# Altium PCB inversor_rev2.PcbDoc
Units mil, origin at the board's own origin, x right, y up, seen from the top; angles counter-clockwise.
Board outline 3939.96 x 3929 mil, 2 copper layers (Top Layer, Bottom Layer); 87 components, 56 nets, 236 pads, 341 vias.
Unrouted connection lines stored in the file: 7.
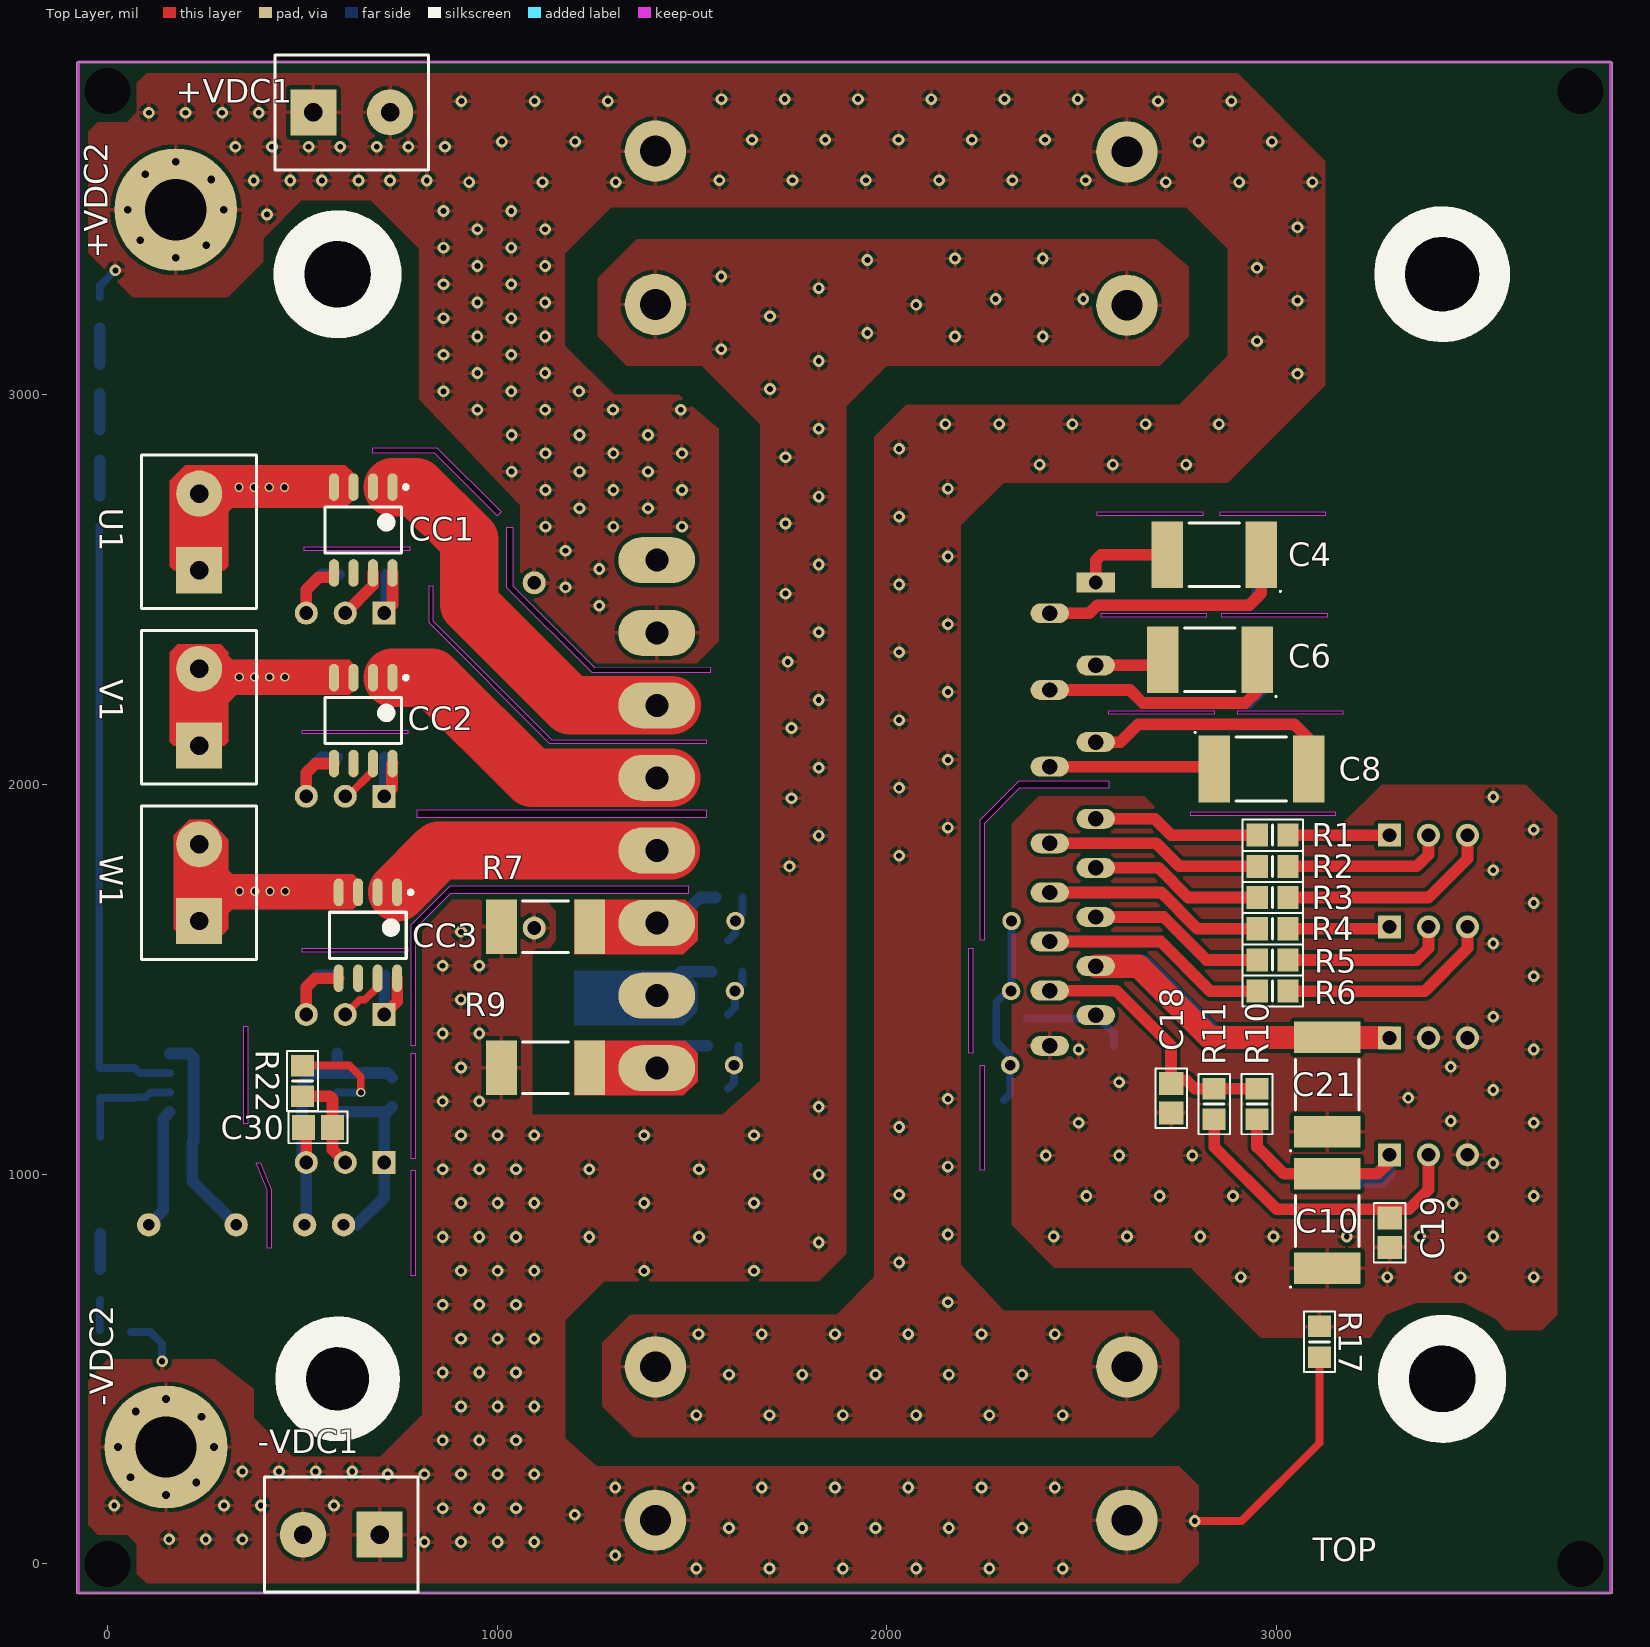
[diagram p0: Top Layer view]
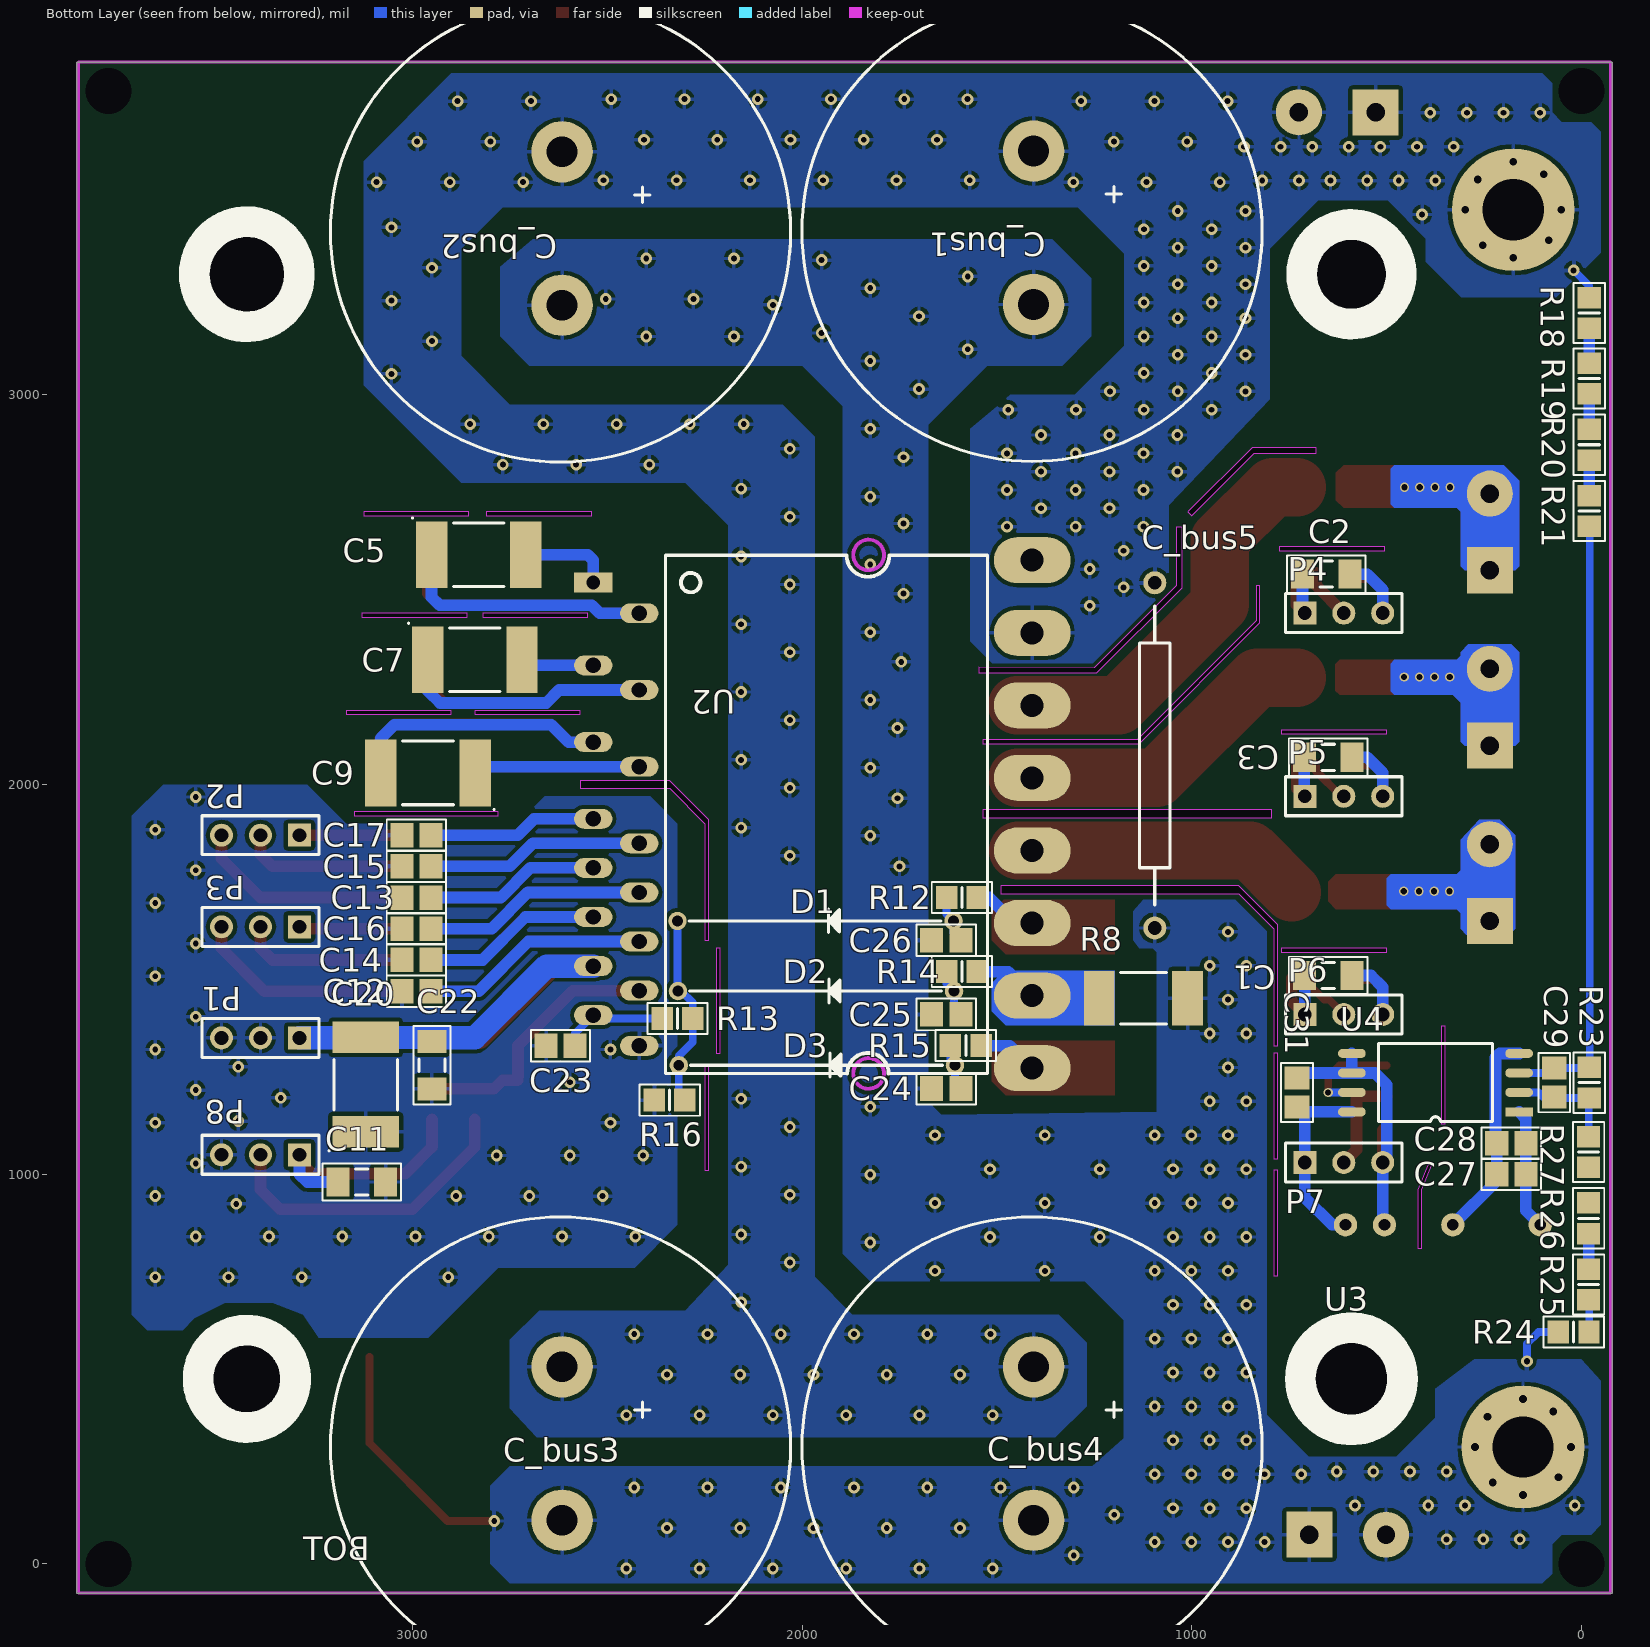
[diagram p1: Bottom Layer view, seen from below]

## Layer stack, top to bottom
Top Solder: solder mask 0.4, Solder Resist, Dk 3.5
Top Layer: signal copper 1.4
Dielectric 1: dielectric 12.6, FR-4, Dk 4.8
Bottom Layer: signal copper 1.4
Bottom Solder: solder mask 0.4, Solder Resist, Dk 3.5

## Board outline
-78.74,-75 3861.22,-75 3861.22,3854 -78.74,3854
cut-out: 790,1330 780,1330 780,1640 880,1740 1490,1740 1490,1720 880,1720 790,1630
cut-out: 795,1935 1536.89,1935 1536.89,1915 795,1915
cut-out: 835,2420 1140.47,2114.53 1536.89,2114.53 1536.89,2105 1135,2105 825,2415 825,2510 835,2510
cut-out: 1024.49,2660.5 1039.5,2660.5 1039.5,2510.5 1250,2300 1546.39,2300.93 1546.39,2286.72 1243.28,2286.72 1024.5,2505.5
cut-out: 680,2865 845,2865 1010,2700 1000,2690 840,2850 680,2850
cut-out: 500,1580 770,1580 770,1570 500,1570
cut-out: 500,2140 770,2140 770,2130 500,2130
cut-out: 505,2610 775,2610 775,2600 505,2600
cut-out: 780,1040 780,1310 790,1310 790,1040
cut-out: 780,740 780,1010 790,1010 790,740
cut-out: 350,1130 350,1380 360,1380 360,1130
cut-out: 410,810 410,960 382,1030 392,1030 420,960 420,810
cut-out: 2550,2440 2820,2440 2820,2430 2550,2430
cut-out: 2540,2700 2810,2700 2810,2690 2540,2690
cut-out: 2855,2700 3125,2700 3125,2690 2855,2690
cut-out: 2570,2190 2840,2190 2840,2180 2570,2180
cut-out: 2900,2190 3170,2190 3170,2180 2900,2180
cut-out: 2860,2440 3130,2440 3130,2430 2860,2430
cut-out: 2780,1930 3150,1930 3150,1920 2780,1920
cut-out: 2240,1010 2240,1280 2250,1280 2250,1010
cut-out: 2210,1310 2210,1580 2220,1580 2220,1310
cut-out: 2250,1600 2240,1600 2240,1910 2340,2010 2570,2010 2570,1990 2340,1990 2250,1900

## Design rules (kind name [scope] priority, off if disabled: settings)
Clearance [All] p1: gap=10 ignorepadtopadclearanceinfootprint=FALSE
Height [All] p1: minheight=0 maxheight=10000 prefheight=500
HoleSize [All] p1: absolutevalues=TRUE maxlimit=1000 minlimit=1 maxpercent=80.000 minpercent=20.000
PlaneClearance [All] p1: clearance=100
PolygonConnect [All] p1: connectstyle=Relief reliefconductorwidth=10 reliefentries=4 polygonreliefangle="90 Angle" airgapwidth=10
RoutingVias [All] p1: holewidth=28 width=50 viastyle="Through Hole" minholewidth=28 minwidth=50 maxholewidth=28 maxwidth=50
SilkToSilkClearance [All] p1: silktosilkclearance=1
SilkToSolderMaskClearance [IsPad] p1: minsilkscreentomaskgap=1 clearancetoexposedcopper=TRUE
SolderMaskExpansion [All] p1: expansion=4
Width [All] p1: maxlimit=150 minlimit=10 preferedwidth=30
25 further rules are at their usual default settings.

## Components (designator, comment, footprint, x,y, rotation, side; value= is the part's Value field where it differs from the comment)
+VDC1 "gen_purpose_conn_1x2" connector1x2_parafuso 626.57,3725 r0 top
+VDC2 "olhal" Olhal 175,3475 r90 top
-VDC1 "gen_purpose_conn_1x2" connector1x2_parafuso 600,75 r180 top
-VDC2 "olhal" Olhal 150,300 r90 top
C1 "Capacitor SMD" CAPC_1206 650,1510 r0 bottom
C2 "Capacitor SMD" CAPC_1206 655,2540 r0 bottom
C3 "Capacitor SMD" CAPC_1206 650,2070 r0 bottom
C4 "Capacitor TANT" CAPC_2917 2840,2590 r180 top
C5 "Capacitor TANT" CAPC_2917 2830,2590 r180 bottom
C6 "Capacitor TANT" CAPC_2917 2828.94,2320 r180 top
C7 "Capacitor TANT" CAPC_2917 2840,2320 r180 bottom
C8 "Capacitor TANT" CAPC_2917 2961.06,2040 r0 top
C9 "Capacitor TANT" CAPC_2917 2960,2030 r0 bottom
C10 "Capacitor TANT" CAPC_2917 3130,880 r90 top
C11 "Capacitor SMD" CAPC_1206 3130,980 r0 bottom
C12 "Capacitor SMD" CAPC_0805 2990,1470 r180 bottom
C13 "Capacitor SMD" CAPC_0805 2990,1710 r180 bottom
C14 "Capacitor SMD" CAPC_0805 2990,1550 r180 bottom
C15 "Capacitor SMD" CAPC_0805 2990,1790 r180 bottom
C16 "Capacitor SMD" CAPC_0805 2990,1630 r180 bottom
C17 "Capacitor SMD" CAPC_0805 2990,1870 r180 bottom
C18 "Capacitor SMD" CAPC_0805 2730,1195 r90 top
C19 "Capacitor SMD" CAPC_0805 3290,850 r90 top
C20 "Capacitor TANT" CAPC_2917 3120,1230 r90 bottom
C21 "Capacitor TANT" CAPC_2917 3130,1230 r90 top
C22 "Capacitor SMD" CAPC_1206 2950,1280 r90 bottom
C23 "Capacitor SMD" CAPC_0805 2620,1330 r180 bottom
C24 "Capacitor SMD" CAPC_0805 1630,1220 r180 bottom
C25 "Capacitor SMD" CAPC_0805 1630,1410 r180 bottom
C26 "Capacitor SMD" CAPC_0805 1630,1600 r180 bottom
C27 "Capacitor SMD" CAPC_0805 180,1000 r180 bottom
C28 "Capacitor SMD" CAPC_0805 180,1080 r180 bottom
C29 "Capacitor SMD" CAPC_0805 70,1235 r90 bottom
C30 "Capacitor SMD" CAPC_0805 540,1120 r0 top
C31 "Capacitor SMD" CAPC_0805 730,1210 r270 bottom
C_bus1 "DC_BUS Capacitor" Capacitor_DCBUS 1200,3220 r90 bottom
C_bus2 "DC_BUS Capacitor" Capacitor_DCBUS 2410,3218 r90 bottom
C_bus3 "DC_BUS Capacitor" Capacitor_DCBUS 2410,100 r90 bottom
C_bus4 "DC_BUS Capacitor" Capacitor_DCBUS 1200,100 r90 bottom
C_bus5 "DC_BUS Capacitor PP" Snubber_cap_0.47uF 1095,1632 r90 bottom
CC1 "ACHS-7123" CC6303_SOP8 656.21,2653.26 r270 top
CC2 "ACHS-7123" CC6303_SOP8 656.21,2164.26 r270 top
CC3 "ACHS-7123" CC6303_SOP8 668.21,1613.26 r270 top
D1 "Diode" Diode_th 1611.34,1650 r0 bottom
D2 "Diode" Diode_th 1610,1470 r0 bottom
D3 "Diode" Diode_th 1607.87,1279.78 r0 bottom
P1 "Header 3" HDR1X3 3390,1350 r0 bottom
P2 "Header 3" HDR1X3 3390,1870 r0 bottom
P3 "Header 3" HDR1X3 3390,1635 r0 bottom
P4 "Header 3" HDR1X3 610,2440 r180 bottom
P5 "Header 3" HDR1X3 610,1970 r180 bottom
P6 "Header 3" HDR1X3 610,1410 r180 bottom
P7 "Header 3" HDR1X3 610,1030 r180 bottom
P8 "Header 3" HDR1X3 3390,1050 r0 bottom
R1 "Resistor" RESC_0805 2990,1870 r0 top
R2 "Resistor" RESC_0805 2990,1790 r0 top
R3 "Resistor" RESC_0805 2990,1710 r0 top
R4 "Resistor" RESC_0805 2990,1630 r0 top
R5 "Resistor" RESC_0805 2990,1550 r0 top
R6 "Resistor" RESC_0805 2990,1470 r0 top
R7 "Resistor" RESC6432X09M 1124,1635 r180 top
R8 "Resistor" RESC6432X09M 1124,1452 r180 bottom
R9 "Resistor" RESC6432X09M 1124,1273 r180 top
R10 "Resistor" RESC_0805 2950,1180 r90 top
R11 "Resistor" RESC_0805 2840,1180 r270 top
R12 "Resistor" RESC_0805 1590,1710 r0 bottom
R13 "Resistor" RESC_0805 2320,1400 r0 bottom
R14 "Resistor" RESC_0805 1590,1520 r0 bottom
R15 "Resistor" RESC_0805 1580,1330 r0 bottom
R16 "Resistor" RESC_0805 2340,1190 r180 bottom
R17 "Resistor" RESC_0805 3110,570 r270 top
R18 "Resistor" RESC_0805 -20,3210 r270 bottom
R19 "Resistor" RESC_0805 -20,3042.05 r270 bottom
R20 "Resistor" RESC_0805 -20,2872.05 r270 bottom
R21 "Resistor" RESC_0805 -20,2702.05 r270 bottom
R22 "Resistor" RESC_0805 500,1239.37 r270 top
R23 "R_MEAS" RESC_0805 -20,1235 r90 bottom
R24 "Resistor" RESC_0805 20,595 r180 bottom
R25 "Resistor" RESC_0805 -18.5,716.95 r90 bottom
R26 "Resistor" RESC_0805 -18.5,886.95 r90 bottom
R27 "Resistor" RESC_0805 -18.5,1056.95 r90 bottom
U1 "gen_purpose_conn_1x2" connector1x2_parafuso 235,2648.43 r90 top
U2 "IKCM30F60GA" ikcm30f60ga 2535.99,2518.44 r180 bottom
U3 "DC/DC_ISO" DC/DC_ISO 605.59,870 r180 bottom
U4 "AMC1200" SOIC8 160,1160 r0 bottom
V1 "gen_purpose_conn_1x2" connector1x2_parafuso 235,2198.43 r90 top
W1 "gen_purpose_conn_1x2" connector1x2_parafuso 235,1748.43 r90 top

## Footprints (in the part's own frame and the unit in brackets; to place one, negate y for a bottom-side part, rotate by r counter-clockwise, add the part's x,y. Pads: shape width x height; smd on the part's side, far side on the other; paste and mask are expansions set on the pad)
Capacitor_DCBUS [mm]
  round 4 hole 2: 1(0.305,5.232) 2(10.305,5.232)
  silkscreen extent -9.92,-9.67 20.08,20.33, body extent -9.67,-9.92 20.33,20.08, height 41
CAPC_0805 [mm] "Chip Capacitor, Body 2.0x1.3mm, IPC Low Density"
  rect 1.5x1.6 smd: 1(-0.95,0) 2(0.95,0)
  silkscreen extent -1.93,-1.03 1.93,1.03, body extent -1.1,-0.72 1.1,0.72, height 1.1
CAPC_1206 [mm] "Chip Capacitor, Body 3.2x1.6mm, IPC Low Density"
  rect 1.5x1.9 smd: 1(-1.55,0) 2(1.55,0)
  silkscreen extent -2.57,-1.21 2.57,1.21, body extent -1.7,-0.9 1.7,0.9, height 1.35
CAPC_2917 [mm] "Chip Capacitor, 2-Leads, Body 7,30x4,20mm, IPC Medium Density"
  rect 2.05x4.35 smd: 1(-3.075,0) 2(3.075,0)
  silkscreen extent -4.36,-2.07 1.65,2.44, body extent -3.75,-2.15 3.75,2.15, height 4
CC6303_SOP8 [mm] "SOP, 8-Leads, Body 4,90x3,91mm, Pitch 1,27mm, IPC Medium Density"
  oval 1.8x0.65 smd: 1(-2.8,1.905) 2(-2.8,0.635) 3(-2.8,-0.635) 4(-2.8,-1.905) 5(2.8,-1.905) 6(2.8,-0.635) 7(2.8,0.635) 8(2.8,1.905)
  silkscreen extent -2.92,-2.5 1.5,2.91, body extent -1.9,-2.5 1.9,2.5, height 2.65
connector1x2_parafuso [mm] "Connector; Header; 2 Position"
  rect 3x3 hole 1.2: 1(-2.5,0)
  round 3 hole 1.2: 2(2.5,0)
  silkscreen extent -5,-3.75 5,3.75, body extent -4.92,-4.53 5.68,4.47, height 14.6
DC/DC_ISO [mil]
  round 60 hole 30: 1(0,0) 2(100,0) 3(275.59,0) 4(500,0)
  body extent -54,-149 572,80, height 315
Diode_th [mm]
  round 1.2 hole 0.7: 1(0,0) 2(18,0)
  silkscreen extent 0.81,-0.79 17.25,0.76, body extent -0.93,-0.75 19.07,0.77, height 1.76
HDR1X3 [mm] "Connector; Header; 3 Position"
  rect 1.5x1.5 hole 0.9: 1(-2.54,0)
  round 1.5 hole 0.9: 2(0,0) 3(2.54,0)
  silkscreen extent -3.81,-1.27 3.81,1.27, body extent -3.81,-1.4 3.91,1.27, height 46.05
ikcm30f60ga [mm]
  rect 2.5x1.3 hole 0.9: 1(0,0)
  oval 2.5x1.3 hole 1: 2(2.997,-2) 3(0,-5.4) 4(2.997,-7) 5(0,-10.4) 6(2.997,-12) 7(0,-15.4) 8(2.997,-17) 9(0,-18.6) 10(2.997,-20.2) 11(0,-21.8) 12(2.997,-23.4) 13(0,-25) 14(2.997,-26.6) 15(0,-28.2) 16(2.997,-30.2)
  oval 5x3 hole 1.5: 17(28.611,-31.655) 18(28.611,-26.925) 19(28.611,-22.195) 20(28.611,-17.465) 21(28.611,-12.735) 22(28.611,-8.005) 23(28.611,-3.275) 24(28.611,1.455)
  Top Layer keep-out circle w0.254: c17.95,1.8 r1
  Top Layer keep-out circle w0.254: c17.95,-32 r1
  silkscreen extent 4.7,-32 25.7,1.78, body extent -0.67,-33.2 29.16,3.1, height 1.3
Olhal [mm]
  round 8 hole 4 unplated: 1(0,0)
RESC6432X09M [mm] "Chip Resistor, 2-Leads, Body 6,40x3,20mm, IPC Low Density"
  rect 2x3.55 smd: 1(-2.875,0) 2(2.875,0)
  silkscreen extent -1.5,-1.68 1.5,1.68, body extent -3.32,-1.73 3.32,1.73, height 0.9
RESC_0805 [mm] "Chip Resistor, Body 2.0x1.3mm, IPC Low Density"
  rect 1.4x1.5 smd: 1(-1,0) 2(1,0)
  silkscreen extent -1.96,-1.01 1.96,1.01, body extent -1.07,-0.7 1.08,0.7, height 0.65
Snubber_cap_0.47uF [mm]
  round 1.5 hole 0.9: 1(0,0) 2(22.5,0)
  silkscreen extent 1.5,-1 21,1, body extent -1.17,-9.45 23.67,-1.55, height 3
SOIC8 [mm]
  rect 1.8x0.6 smd: 1(0,0)
  oval 1.8x0.6 smd: 2(0,-1.27) 3(0,-2.54) 4(0,-3.81) 5(10.9,-3.81) 6(10.9,-2.54) 7(10.9,-1.27) 8(10.9,0)
  silkscreen extent 1.73,-4.44 9.17,0.64, body extent 1.7,-4.52 9.22,0.69, height 3

## Part data
+VDC1 -VDC1 U1 V1 W1: LCSC=C138464, VPN=172-2555
C1 C2 C3 C11 C22 C27 C28 C31: "10uF"
C4 C5 C6 C7 C8 C9: library part tantalum_CAP, "10uF 50V TANT"
C10 C20 C21: library part tantalum_CAP, "10uF 50V TANT", LCSC=C224948, VPN=75-MKP1848610704K2
C12 C13 C14 C15 C16 C17 C18 C19 C23 C24 C25 C26: "10nF"
C29 C30: "1uF"
C_bus1 C_bus2 C_bus3 C_bus4: library part CAPACITOR_dcbus, "DC_BUS CAP", VPN=505-DCP5-114/900/10
C_bus5: library part CAPACITOR_dcbus, "DC_BUS  CAP PP", VPN=505-DCP5-114/900/10
CC1 CC2 CC3: library part Current_Sensor_cc6303, LCSC=C286005, VPN=630-ACHS-7123-000E
D1 D2 D3: "1N4148", Code_JEDEC=DO-214-AB, LatestRevisionDate=17-Jul-2002, LatestRevisionNote="Re-released for DXP Platform.", PackageDescription="DO-214-AB/SMC; 2 C-Bend Leads; Body 7.9 x 5.9 mm, inc. leads (LxW)", PackageReference=SMC, PackageVersion=Sep-1996, Published=8-Jun-2000, Publisher="Altium Limited"
P1 P2 P3 P4 P5 P6 P7 P8: "Header, 3 pin"
R1 R2 R3 R4 R5 R6 R12 R14 R15: "100R"
R7 R8 R9: "Current sense resistor"
R10: "3K6"
R11: "1K"
R13: "1K8"
R16: "3K"
R17: "0R"
R18 R19 R20 R21 R24 R25 R26 R27: "30K", LCSC=C40087
R22: "330R", LCSC=C269732
R23: library part Resistor, "150R"
U2: "Intelligent Power Module 600V@30A"
U3: LCSC=C98815
U4: LCSC=C79905

## Free pads (board coordinates)
  round 60 hole 118.11 unplated: 4(0,0) 4(0,3779.53) 4(3779.53,3779.53) 4(3779.53,0)
  round 78.74 hole 196.85: 5(590.35,475) 6(3425,475) 7(3425,3309.65) 8(590.35,3309.65)

## Via types
v1: diameter 30, hole 15, Top Layer to Bottom Layer, 310 vias
v2: diameter 23.62, hole 19.68, Top Layer to Bottom Layer, 16 vias
v3: diameter 23.62, hole 15.75, Top Layer to Bottom Layer, 13 vias
v4: diameter 30, hole 15.75, Top Layer to Bottom Layer, 2 vias

## Nets (pads, with @x,y where several pads share a name; then routed paths per layer and width w, separated by ;. In a path a pad name is that pad's centre, name@x,y a point inside that pad or via, vN(x,y) a via of type N, cw(c..) or ccw(c..) an arc to the next point about the centre after c; other vN are vias at no path point)
5gnd: C1.1 C2.1 C3.1 C30.1 C31.1 CC1.5 CC2.5 CC3.5 P4.3 P5.3 P6.3 P7.3 U3.2 U4.5 U4.6 | length 1677.1
  Top Layer w30: C30.1 510,1112.6 P7.3 ; P6.3 510,1480 533.02,1503.02 CC3.5 ; P5.3 510,2030 534.02,2054.02 CC2.5 ; P4.3 510,2500 541.81,2531.81 570,2531.81 CC1.5
  Bottom Layer w30: U3.2@505.59,880 510,884.41 P7.3 500,1040 500,1230 530,1260 U4.6 ; P6.3 510,1480 540,1510 C1.1 ; P5.3 510,2030 550,2070 C3.1 ; P4.3 510,2500 550,2540 C2.1 ; U4.5 U4.6 ; C31.1 717.4,1260 U4.6
5Vdc: C1.2 C2.2 C3.2 C31.2 CC1.8 CC2.8 CC3.8 P4.1 P5.1 P6.1 P7.1 U3.1 U4.8 | length 1118.9
  Top Layer w30: P6.1 743.21,1443.21 CC3.8 ; P5.1 730,1990 730,2052.81 CC2.8 ; P4.1 731.21,2461.21 CC1.8
  Bottom Layer w30: U4.8 C31.2@717.4,1160 ; U3.1@605.59,880 615.59,870 640,870 710,940 P7.1 710,1152.6 C31.2@717.4,1160 ; P6.1 710,1508.98 C1.2 ; P5.1 711.02,1971.02 C3.2 ; P4.1@716.02,2440 C2.2 ; C31.2 C31.2@717.4,1160
15gnd: C10.1 C11.1 C12.1 C13.1 C14.1 C15.1 C16.1 C17.1 C18.1 C19.1 C20.1 C21.1 C22.1 C23.1 P1.2 P1.3 P8.3 R16.1 R17.1 U2.16
  other v1: 2908,736 3284,736 3472,736 3660,736 2428,840 2616,840 2804,840 2992,840 3180,840 3368,840 3556,840 3452,924 2512,944 2700,944 2888,944 3660,944 3556,1028 2408,1048 2596,1048 2784,1048 2492,1132 3660,1132 3447,1136.5 3338,1196 3556,1216 2596,1236 3447,1275.5 2492,1320 3660,1320 3556,1404 3660,1508 3556,1592 3660,1696 3660,1696 3556,1780 3660,1884 3556,1968
15VCC: C20.2 C21.2 C22.2 P1.1 U2.13 | length 1668.9
  Top Layer w60: U2.13 2645.81,1534.19 2828.94,1351.06 C21.2 3288.94,1351.06 P1.1
  Bottom Layer w60: U2.13 2655.81,1534.19 2840,1350 2941.02,1350 C22.2 2960.04,1351.06 C20.2 3121.06,1350 P1.1
+VDCBUS: +VDC1.1 +VDC1.2 +VDC2.1 C_bus1.2 C_bus2.2 C_bus3.2 C_bus4.2 C_bus5.2 R18.1 U2.23 | length 86.7
  Bottom Layer w20: R18.1 -20,3279.52 v4(20,3319.52)
  other v1: 1511,381.7 1699,381.7 1887,381.7 2075,381.7 2263,381.7 2451,381.7 1595,485.7 1783,485.7 1971,485.7 2159,485.7 2347,485.7 1516.49,589.7 1679,589.7 1867,589.7 2055,589.7 2243,589.7 2431,589.7 2156.45,671.46 2031.45,773.46 2156.45,845.46 2031.45,947.46 2156.45,1019.46 2031.45,1121.46 2156.45,1193.46 2031.45,1817.46 2156.45,1889.46 2031.45,1991.46 2156.45,2063.46 2031.45,2165.46 2156.45,2237.46 2031.45,2339.46 2156.45,2411.46 1262,2459 1175,2506 2031.45,2513.46 1262,2553 2156.45,2585.46 1175,2600 1124,2662 1298,2662 1474,2662 2031.45,2687.46 1211,2709 1387,2709 1124,2756 1298,2756 1474,2756 2156.45,2759.46 1037,2803 1211,2803 1387,2803 2392,2821 2580,2821 2768,2821 1124,2850 1298,2850 1474,2850 2031.45,2861.46 1037,2897 1211,2897 1387,2897 2150,2925 2288,2925 2476,2925 2664,2925 2852,2925 949,2962 1123,2962 1297,2962 1471,2962 862,3009 1036,3009 1210,3009 3054,3054 949,3056 1123,3056 862,3103 1036,3103 2950,3138 949,3150 1123,3150 862,3197 1036,3197 949,3237 1123,3237 3054,3242 862,3284 1036,3284 2950,3326 949,3331 1123,3331 862,3378 1036,3378 949,3425 1123,3425 3054,3430 409,3463 862,3472 1036,3472 928,3546 1116,3546 1304,3546 2716,3546 2904,3546 3092,3546 375,3550 469,3550 550,3550 644,3550 725,3550 819,3550 1570,3551 1758,3551 1946,3551 2134,3551 2322,3551 2510,3551 328,3637 422,3637 516,3637 597,3637 691,3637 772,3637 866,3637 1012,3650 1200,3650 2800,3650 2988,3650 1654,3655 1842,3655 2030,3655 2218,3655 2406,3655 106,3724 200,3724 294,3724 388,3724 908,3754 1096,3754 1284,3754 2696,3754 2884,3754 1575.49,3759 1738,3759 1926,3759 2114,3759 2302,3759 2490,3759
  other v2: 175,3352 253,3384 84,3397 52,3475 298,3475 266,3553 97,3566 175,3598
-VDCBUS: -VDC1.1 -VDC1.2 -VDC2.1 C24.1 C25.1 C26.1 C_bus1.1 C_bus2.1 C_bus3.1 C_bus4.1 C_bus5.1 R7.2 R8.2 R9.2 R17.2 R24.1 | length 761.5
  Top Layer w20: v1(2790,110) 2910,110 3110,310 R17.2
  Bottom Layer w20: R24.1 110,595 140,565 v4(140,520)
  other v1: 1511,-12 1699,-12 1887,-12 2075,-12 2263,-12 2451,-12 1303,22 813,56 907,56 1001,56 1095,56 158,63 252,63 346,63 1595,92 1783,92 1971,92 2159,92 2347,92 1199,126 860,143 954,143 1048,143 17,150 299,150 393,150 581,150 1303,196 1491,196 1679,196 1867,196 2055,196 2243,196 2431,196 719,230 813,230 907,230 1001,230 1095,230 346,237 440,237 534,237 628,237 860,317 954,317 1048,317 907,404 1001,404 1095,404 860,491 954,491 1048,491 907,578 1001,578 1095,578 860,665 954,665 1048,665 907,752 1001,752 1095,752 1377,752 1659,752 1825,825 860,839 954,839 1048,839 1236,839 1518,839 907,926 1001,926 1095,926 1377,926 1659,926 1825,999 860,1013 954,1013 1048,1013 1236,1013 1518,1013 907,1100 1001,1100 1095,1100 1377,1100 1659,1100 1825,1173 860,1187 954,1187 907,1274 860,1361 954,1361 907,1448 860,1535 954,1535 907,1622 1750,1790 1825,1869 1755,1965 1825,2043 1755,2145 1825,2217 1745.5,2315 1825,2391 1740,2490 1825,2565 1740,2670 1825,2739 1740,2840 1825,2913 1700,3015 1825,3087 1575,3117 2175,3150 2400,3150 1950,3159 1700,3202 2075,3231 2279,3246 2504,3246 1825,3274 1575,3304 1950,3346 2175,3350 2400,3350
  other v2: 150,177 228,209 59,222 27,300 273,300 241,378 72,391 150,423
Gnd1: C27.1 C28.1 U3.3 U4.4 | length 542.2
  Bottom Layer w30: U4.4 210,1310 220.43,1299.57 220.43,1083.03 C28.1 C27.1 217.4,982.6 U3.3
I_U: CC1.7 P4.2 | length 151.5
  Top Layer w20: CC1.7@682.21,2524.01 CC1.7@682.21,2543.02
  Top Layer w30: P4.2 681.21,2511.21 CC1.7
I_V: CC2.7 P5.2 | length 117.2
  Top Layer w20: P5.2 616.21,1970 681.21,2035.01 CC2.7
I_W: CC3.7 P6.2 | length 134.9
  Top Layer w20: P6.2 647.59,1447.59 660.25,1447.59 693.21,1480.55 CC3.7
IN_UH: C17.2 R1.1 U2.7 | length 866.2
  Top Layer w30: U2.7 2687.86,1912.14 2730,1870 R1.1
  Bottom Layer w30: U2.7 2687.86,1912.14 2730,1870 C17.2
IN_UL: C16.2 R4.1 U2.10 | length 1144.4
  Top Layer w30: U2.10 2703.7,1723.17 2796.86,1630 R4.1
  Bottom Layer w30: U2.10 2703.7,1723.17 2796.86,1630 C16.2
IN_VH: C15.2 R2.1 U2.8 | length 1129.7
  Top Layer w30: U2.8 2690.85,1849.15 2750,1790 2950,1790 R2.1@2960,1780
  Bottom Layer w30: U2.8 2690.85,1849.15 2750,1790 C15.2
IN_VL: C14.2 R5.1 U2.11 | length 922.5
  Top Layer w30: U2.11 2710.12,1660.17 2820.29,1550 R5.1
  Bottom Layer w30: U2.11 2709.83,1660.17 2820,1550 C14.2
IN_WH: C13.2 R3.1 U2.9 | length 894.3
  Top Layer w30: U2.9 2697.27,1786.16 2773.43,1710 R3.1
  Bottom Layer w30: U2.9 2697.27,1786.16 2773.43,1710 C13.2
IN_WL: C12.2 R6.1 U2.12 | length 1172.6
  Top Layer w30: U2.12 2702.82,1597.18 2830,1470 R6.1
  Bottom Layer w30: U2.12 2702.82,1597.18 2830,1470 C12.2
iTRIP: C23.2 R13.2 U2.15 | length 277.5
  Bottom Layer w20: R13.2 2527.79,1400 U2.15 2582.6,1361.6 C23.2
NetC4_1: C4.1 C5.1 U2.2 | length 1322.4
  Top Layer w30: U2.2 2519.7,2439.7 2540,2460 2930,2460 2961.06,2491.06 C4.1
  Bottom Layer w30: U2.2 2519.7,2439.7 2540,2460 2930,2460 2951.06,2481.06 C5.1
NetC4_2: C4.2 C5.2 U2.1 | length 482.6
  Top Layer w30: U2.1 2535.99,2575.99 2550,2590 C4.2
  Bottom Layer w30: U2.1 2535.99,2575.99 2550,2590 C5.2
NetC6_1: C6.1 C7.1 U2.4 | length 1287.1
  Top Layer w30: U2.4 2623.68,2242.85 2657.16,2209.37 2899.37,2209.37 2919.37,2209.37 2950,2240 C6.1
  Bottom Layer w30: U2.4 2623.15,2242.85 2656.63,2209.37 2929.37,2209.37 2960,2240 C7.1@2960,2320
NetC6_2: C6.2 C7.2 U2.3 | length 370.8
  Top Layer w30: U2.3 2693.72,2305.84 C6.2
  Bottom Layer w30: U2.3 C7.2@2729.09,2305.84
NetC8_1: C8.1 C9.1 U2.6 | length 852.5
  Top Layer w30: U2.6 C8.1@2840,2046 ; C8.1@2834,2046 C8.1
  Bottom Layer w30: U2.6 C9.1@2840,2046
NetC8_2: C8.2 C9.2 U2.5 | length 1325.2
  Top Layer w30: U2.5 2598.99,2108.99 2645,2155 3045,2155 3082.13,2117.87 C8.2
  Bottom Layer w30: U2.5 2598.99,2108.99 2643.5,2153.5 3046.5,2153.5 3081.06,2118.94 C9.2
NetC10_2: C10.2 C11.2 P8.1 R10.1 | length 627.2
  Top Layer w30: R10.1 2950,1070 3018.94,1001.06 C10.2 3258.94,1001.06 3290,1032.13 P8.1
  Bottom Layer w30: C11.2 3270,980 3290,1000 P8.1
NetC19_2: C19.2 P8.2 R11.2 | length 797.6
  Top Layer w30: R11.2 2840,1070 3000,910 3340,910 3390,960 P8.2
NetC24_2: C24.2 D3.1 R15.2 | length 121.1
  Bottom Layer w20: C24.2 1607.87,1235.28 D3.1 1619.37,1291.28 R15.2
NetC25_2: C25.2 D2.1 R14.2 | length 125.2
  Bottom Layer w20: C25.2 1610,1427.4 D2.1 1629.37,1489.37 R14.2
NetC26_2: C26.2 D1.1 R12.2 | length 125.2
  Bottom Layer w20: C26.2 1611.34,1618.74 D1.1 1629.37,1668.03 R12.2
NetCC1_1: CC1.1 CC1.2 U2.22 | length 1045.5
  Top Layer w150: CC1.1 792.5,2763.5 928,2628 928,2463 1187.72,2203.28 U2.22@1448,2203.28
NetCC1_3: CC1.3 CC1.4 U1.1 U1.2
  other v3: 337,2763.15 376,2763.15 415,2763.15 454,2763.15
NetCC2_1: CC2.1 CC2.2 U2.21 | length 822.4
  Top Layer w150: CC2.1 832.5,2274.5 1089.94,2017.06 U2.21@1447,2017.06
NetCC2_3: CC2.3 CC2.4 V1.1 V1.2
  other v3: 338,2276 377,2276 416,2276 455,2276
NetCC3_1: CC3.1 CC3.2 U2.20 | length 746.3
  Top Layer w150: CC3.1 850.56,1830.84 U2.20@1445,1830.84
NetCC3_3: CC3.3 CC3.4 W1.1 W1.2
  other v3: 339,1726.15 378,1726.15 417,1726.15 456,1726.15
NetD1_2: D1.2 D2.2 D3.2 R13.1 R16.2 | length 502.8
  Bottom Layer w20: R16.2 2316.54,1205.91 D3.2 2316.54,1303.46 2280.63,1339.37 R13.1 2280.63,1440.63 2310,1470 D2.2 2320,1471.34 D1.2
NetP2_1: P2.1 R1.2 | length 260.6
  Top Layer w30: R1.2 P2.1
NetP2_2: P2.2 R2.2 | length 423.1
  Top Layer w30: R2.2 3360,1790 3390,1820 P2.2
NetP2_3: P2.3 R3.2 | length 562.1
  Top Layer w30: R3.2 3390,1710 3490,1810 P2.3
NetP3_1: P3.1 R4.2 | length 240.6
  Top Layer w30: R4.2 P3.1@3270,1630
NetP3_2: P3.2 R5.2 | length 428.1
  Top Layer w30: R5.2 3360,1550 3390,1580 P3.2
NetP3_3: P3.3 R6.2 | length 561.2
  Top Layer w30: R6.2 3380,1470 3490,1580 P3.3
NetR18_2: R18.2 R19.1 | length 91.3
  Bottom Layer w30: R19.1@-20,3079.37 R18.2
NetR19_2: R19.2 R20.1 | length 91.3
  Bottom Layer w30: R20.1 R19.2
NetR20_2: R20.2 R21.1 | length 91.3
  Bottom Layer w30: R21.1 R20.2
NetR22_1: R22.1 U4.7 | length 262.8
  Top Layer w20: R22.1 621.26,1278.74 650,1250 v3(650,1210)
  Bottom Layer w20: U4.7 v3(650,1210)
NetR24_2: R24.2 R25.1 | length 78.2
  Bottom Layer w20: R24.2@-20,600 -20,676.08 R25.1
NetR25_2: R25.2 R26.1 | length 91.3
  Bottom Layer w30: R25.2 R26.1
NetR26_2: R26.2 R27.1
NU: R7.1 R12.1 U2.19 | length 177.5
  Bottom Layer w30: U2.19 1434.95,1670 1480,1670 1520,1710 R12.1@1560,1710
NV: R8.1 R14.1 U2.18 | length 166.6
  Bottom Layer w30: U2.18 1471.17,1520 R14.1
NW: R9.1 R15.1 U2.17 | length 155
  Bottom Layer w30: U2.17 1467.39,1330 R15.1
V_DC: C30.2 P7.2 R22.2 | length 256.6
  Top Layer w30: R22.2 570,1200 577.4,1192.6 C30.2 577.4,1062.6 P7.2
Vamp1: C29.1 R23.1 R27.2 U4.2 | length 285.9
  Bottom Layer w20: R27.2 -18.5,1194.13 R23.1 68.03,1195.63 C29.1 97.6,1197.6 110,1210 U4.2
Vamp2: C29.2 R21.2 R23.2 U4.3 | length 1575.8
  Bottom Layer w20: R21.2@-21.5,2662.68 -21.5,1274.37 -19.54,1272.4 C29.2 82.4,1260 U4.3
Vdd1: C27.2 C28.2 U3.4 U4.1 | length 312.5
  Bottom Layer w30: U3.4 142.6,907.01 C27.2 C28.2 142.6,1142.6 U4.1
Vfo: C18.2 R10.2 R11.1 U2.14 | length 679
  Top Layer w30: U2.14 2588.8,1471.2 2728.98,1331.02 C18.2@2728.98,1250 ; C18.2@2730,1241.02 2768.98,1241.02 2790.63,1219.37 R11.1 R10.2
pads on no net: CC1.6 CC2.6 CC3.6 U2.24

## Polygon pours and split planes (outlines as drawn)
15gnd on Top Layer "Top Layer-No Net" (solid, pour order 40): 2390,1970 2320,1900 2320,870 2430,760 2780,760 2960,580 3240,580 3280,640 3360,670 3480,670 3560,630 3590,600 3680,600 3720,640 3720,1920 3640,2000 3270,2000 3170,1900 2730,1900 2660,1970
+VDCBUS on Top Layer "Top Layer-No Net" (solid, pour order 27): 1500.15,2300.15 1257.85,2300.15 1059,2499 1059,2716.26 800,2988.78 800,3375 675,3500 496.61,3500 400,3400.7 400,3342 308,3250 64.97,3250 -50,3364.97 -50,3675 -25,3700 50,3700 75.08,3725.08 74.96,3799.96 100,3825 2900,3825 3125,3600 3125,3025 2875,2775 2300,2775 2190,2665 2190,767.51 2300,650 2680.5,650 2750,575 2750,400 2680.5,325 1350,325 1270,405 1270,568.16 1341.84,640 1871,640 1968,737 1968,1193 1968,2893 2050,2975 2750,2975 2875,3100 2875,3375 2768,3482 2482,3482 1293.22,3482 1173,3361.78 1173,3126.01 1300.65,3000 1466,3000 1568,2913.56 1568,2368
-VDCBUS on Top Layer "Top Layer-No Net" (solid, pour order 29): 1358,3400 1258,3300 1258,3150 1333,3075 1525,3075 1675,2925 1675,1240 1578,1153 1090,1153 1090,1570 1100,1580 1135,1580 1150,1600 1150,1674.44 1125,1705 885,1704.28 808,1624 808,383 700,275 475,275 375,375 375,450 275,525 0.56,525 -50,469.76 -50,100 -25,75 50,75 75,50 75,-25 100,-50 975,-50 2750,-50 2800,0 2800,200 2750,250 1255,250 1175,322.73 1175,625 1275,725 1825,725 1896,796 1896,1246 1896,2971 2000,3075 2700,3075 2775,3150 2775,3328.6 2691.59,3400
+VDCBUS on Bottom Layer "Top Layer-No Net" (solid, pour order 34): 1500.15,2300.15 1257.85,2300.15 1059,2499 1059,2716.26 800,2988.78 800,3375 675,3500 496.61,3500 400,3400.7 400,3342 308,3250 64.97,3250 -50,3364.97 -50,3675 -25,3700 50,3700 75.08,3725.08 74.96,3799.96 100,3825 2900,3825 3125,3600 3125,3025 2875,2775 2300,2775 2190,2665 2190,767.51 2300,650 2675,650 2750,575 2750,400 2680.5,325 1350,325 1270,405 1270,568.16 1341.84,640 1871,640 1968,737 1968,1193 1968,2893 2050,2975 2750,2975 2875,3100 2875,3375 2768,3482 2482,3482 1293.22,3482 1173,3361.78 1173,3126.01 1300.65,3000 1466,3000 1568,2913.56 1568,2368
-VDCBUS on Bottom Layer "Top Layer-No Net" (solid, pour order 36): 1358,3400 1258,3300 1258,3150 1333,3075 1525,3075 1676.47,2923.53 1676.47,1186.47 1643,1153 1090,1159.76 1090,1570 1100,1580 1135,1580 1150,1600 1150,1674.67 1125,1705 1049,1704 888,1704 808,1624 808,383 700,275 475,275 375,375 375,450 275,525 0.56,525 -50,469.76 -50,100 -25,75 50,75 75,50 75,-25 100,-50 975,-50 2750,-50 2800,0 2800,200 2750,250 1255,250 1175,322.73 1175,625 1275,725 1825,725 1896,796 1896,1246 1896,2971 2000,3075 2700,3075 2775,3150 2775,3328.6 2691.59,3400
15gnd on Bottom Layer "Top Layer-No Net" (solid, pour order 42): 2390,1970 2320,1900 2320,870 2430,760 2780,760 2960,580 3240,580 3280,640 3360,670 3480,670 3560,630 3590,600 3680,600 3720,640 3720,1920 3640,2000 3270,2000 3170,1900 2730,1900 2660,1970

## Keep-outs
Keep-Out Layer:
  lines w7.87: -75,3578 -74,3579 ; -75,3853 -75,-75 3857,-75 3857,3854 -74,3854

## Other copper
Top Layer:
  region net NetCC1_3: 160,2560 170,2550 300,2550 310,2560 310,2700 320,2710 610,2710 630,2730 630,2800 610,2820 200,2820 160,2780
  region net NetCC3_3: 170,1630 184.79,1615.21 295.21,1615.21 310,1630 310,1670 320,1680 630,1680 650,1700 650,1750 630,1770 320,1770 310,1780 310,1858.18 262.5,1910 210,1910 170,1870
  region net NetCC2_3: 160,2110 170,2100 300,2100 310,2110 310,2210 330,2230 620,2230 631.25,2241.25 631.25,2308.75 620,2320 320,2320 310,2330 310,2340 290,2360 180,2360 160,2340
  region net NW: 1198,1343 1482,1343 1514,1311 1514,1239 1478,1203 1198,1203
  region net NU: 1198,1705 1482,1705 1514,1673 1514,1601 1478,1565 1198,1565
Bottom Layer:
  region net NetCC2_3: 160,2110 170,2100 300,2100 310,2110 310,2210 330,2230 480,2230 490,2240 490,2310 480,2320 320,2320 310,2330 310,2340 290,2360 180,2360 160,2340
  region net NetCC3_3: 170,1630 184.79,1615.21 295.21,1615.21 310,1630 310,1670 320,1680 490,1680 500,1690 500,1760 490,1770 320,1770 310,1780 310,1858.18 262.5,1910 210,1910 170,1870
  region net NetCC1_3: 160,2560 170,2550 300,2550 310,2560 310,2700 320,2710 480,2710 490,2720 490,2810 480,2820 200,2820 160,2780
  region net NV: 1197.81,1522 1481.81,1522 1513.81,1490 1513.81,1418 1477.81,1382 1197.81,1382

## Silkscreen, mask and mechanical layers (free items; w line width, h text height)
Top Overlay:
  circle w78.74: c590.35,3309.65 r124.82
  circle w78.74: c3425,3309.65 r134.77
  circle w78.74: c3425,475 r125
  circle w78.74: c590.35,475 r120.51
  text "TOP" at 3093.26,6.26 h60
Bottom Overlay:
  circle w78.74: c590.35,3309.65 r127.65
  circle w78.74: c3425,3309.65 r134.77
  circle w78.74: c3425,475 r125
  circle w78.74: c590.35,475 r131.01
  text "BOT" at 3110,10 h60
Top Solder:
  region: 170,1630 184.79,1615.21 295.21,1615.21 310,1630 310,1670 320,1680 630,1680 650,1700 650,1750 630,1770 320,1770 310,1780 310,1858.18 262.5,1910 210,1910 170,1870
  region: 160,2110 170,2100 300,2100 310,2110 310,2210 330,2230 620,2230 640,2250 640,2300 620,2320 320,2320 310,2330 310,2340 290,2360 180,2360 160,2340
  region: 160,2560 170,2550 300,2550 310,2560 310,2700 320,2710 610,2710 630,2730 630,2800 610,2820 200,2820 160,2780
  region: 887,1704 1125,1705 1150,1675 1150,1600 1135,1580 1100,1580 1090,1570 1093,-50 175,-50 100,-50 75,-25 75,50 50,75 -25,75 -50,100 -50,175 -50,475 0,525 275,525 375,450 375,375 475,275 700,275 807,376.87 807,1075.5 807,1218 807,1624
  region: 1198,1343 1482,1343 1514,1311 1514,1239 1478,1203 1198,1203
  region: 1198,1705 1482,1705 1514,1673 1514,1601 1478,1565 1198,1565
  region: 1511.65,2311.65 1568,2368 1568,2913.56 1481.56,3000 1300.65,3000 1175.65,3125 1175,3125 1175,3825 100,3825 74.96,3799.96 75.08,3799.85 75.08,3725.08 50,3700 -25,3700 -50,3675 -50,3364.97 64.97,3250 308,3250 400,3342 400,3403.39 496.61,3500 675,3500 800,3375 800,2975.26 1075,2700.26 1075,2500 1263.35,2311.65
Bottom Solder:
  region: 1197.81,1522 1481.81,1522 1513.81,1490 1513.81,1418 1477.81,1382 1197.81,1382
Mechanical 13:
  lines w7.87: -75,-75 -75,3854 3857,3854 3857,-75 -75,-75